# EAGLE board solderingSkillsFault (EAGLE 9.1.3)
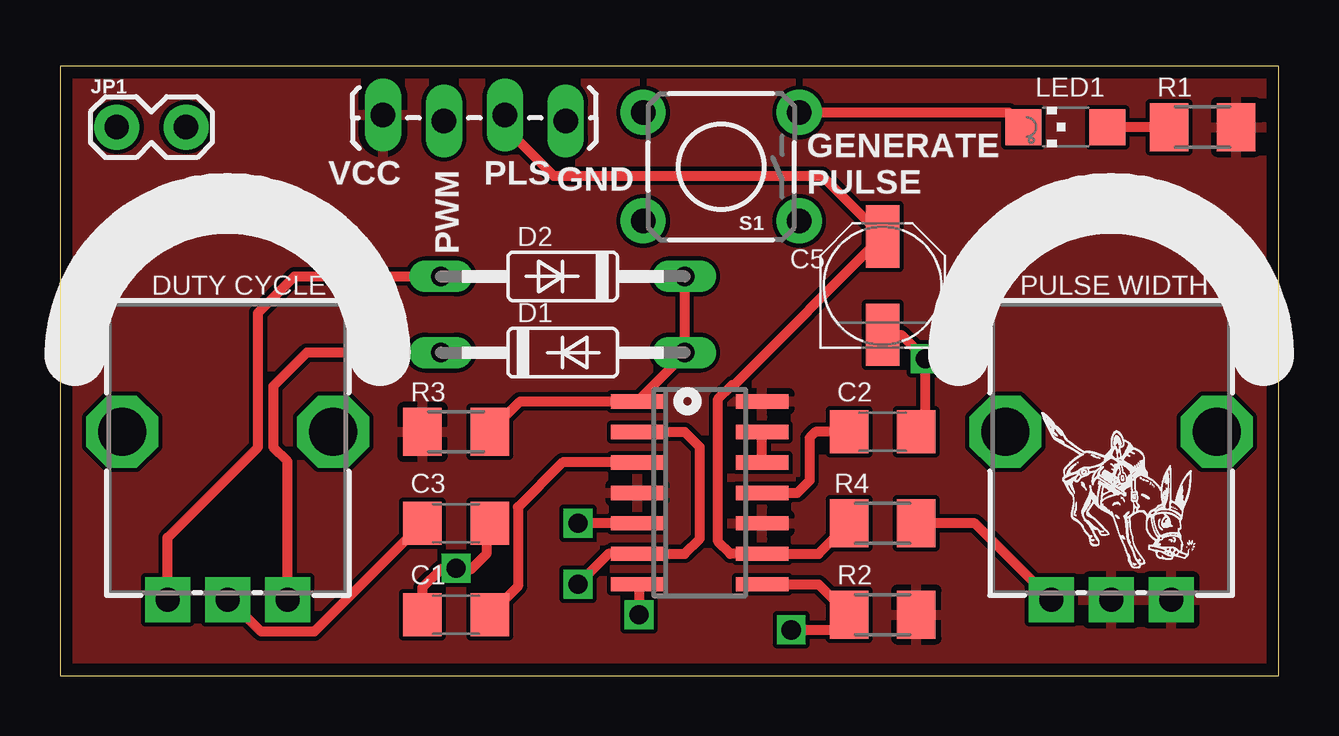
[diagram p0: board, top side]
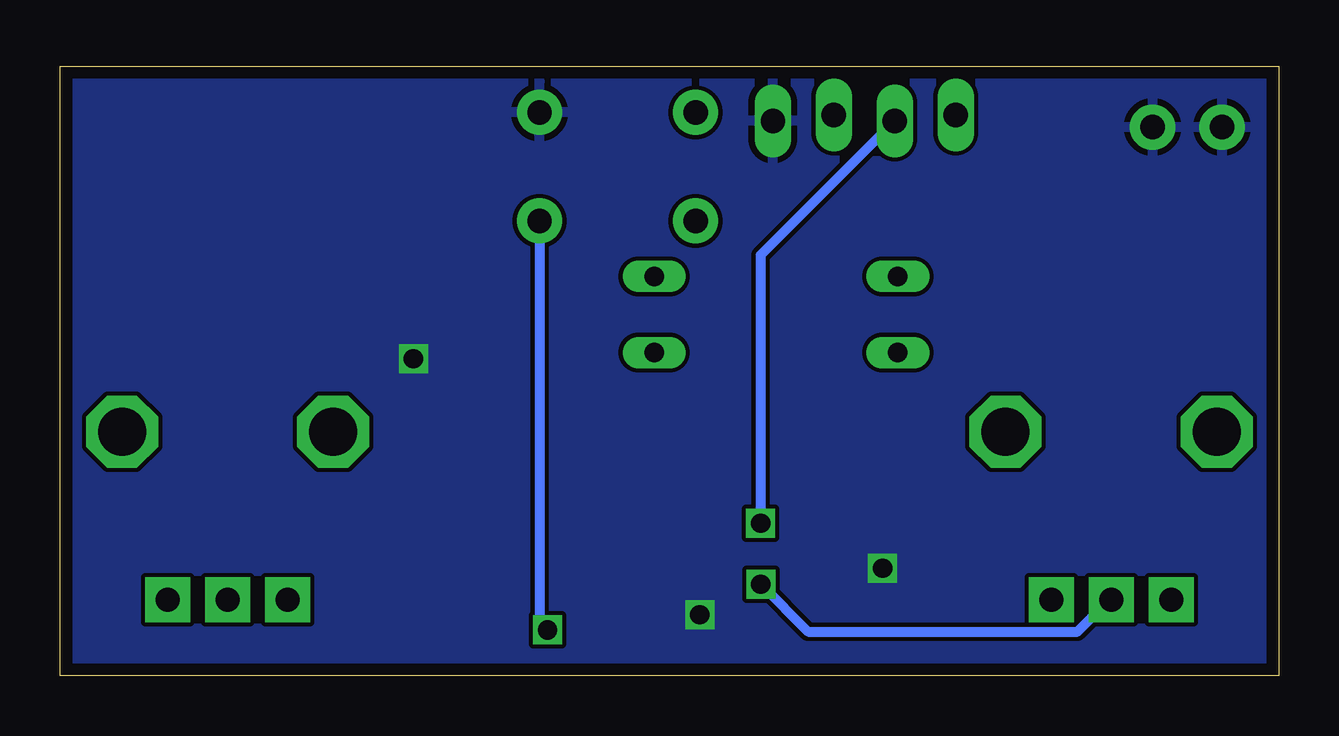
[diagram p1: board, bottom side, seen from below]

Size 50.8 x 25.4 mm. Coordinates in mm from the lower left corner, seen from the top.
Outline: 0,0 50.8,0 50.8,25.4 0,25.4 0,0
Copper layers (1*16): Top 0.0356mm / dielectric 1.5011mm / Bottom 0.0356mm
Design rules "solderingSkills *": minimum track width 7mil, minimum drill 14mil, track to track 7mil, track to pad 7mil, pad to pad 7mil, via to via 7mil, smd to smd 0mil, copper to edge 20mil, drill to drill 8mil, minimum pad ring 10mil, minimum via ring 8mil, stop-mask expansion 4mil, vias tented up to drill 0mil, thermal gap 10mil

## Footprints (pad centres in the part's own frame; a part is rotated, then mirrored left to right if it is on the bottom)
C1206 = smd 1.6 x 1.8: 1 -1.4,0; 2 1.4,0
PANASONIC_C = smd 2.6 x 1.4: + 2.05,0; - -2.05,0
DO35-10 = drill 0.813 long: A 5.08,0; C -5.08,0
SO14 = smd 0.6 x 2.2: 1 -3.81,-2.6; 2 -2.54,-2.6; 3 -1.27,-2.6; 4 0,-2.6; 5 1.27,-2.6; 6 2.54,-2.6; 7 3.81,-2.6; 8 3.81,2.6; 9 2.54,2.6; 10 1.27,2.6; 11 0,2.6; 12 -1.27,2.6; 13 -2.54,2.6; 14 -3.81,2.6
1X04_LOCK_LONGPADS = drill 1.016 long: 1 0,0; 2 2.54,-0.254; 3 5.08,0; 4 7.62,-0.254
1X02_LOCK = drill 1.016 pad 1.88: 1 -0.178,0; 2 2.718,0
CHIPLED_1206 = smd 1.5 x 1.5: A 0,-1.75; C 0,1.75
M1206 = smd 1.6 x 2: 1 -1.4,0; 2 1.4,0
TACTILE_SWITCH_PTH_6.0MM = drill 1.016 pad 1.88: 1 -3.251,2.261; 2 3.251,2.261; 3 -3.251,-2.261; 4 3.251,-2.261
POT-PTH-ALPS = drill 1 pad 1.88 square: P$1 7,-2.5; P$2 7,0; P$3 7,2.5 | drill 2 octagon: P$4 0,-4.4; P$5 0,4.4

## Placement (x,y rotation side)
C1  100nF  [C1206]  16.51,2.54 180 top
C2  100nF  [C1206]  34.29,10.16 0 top
C3  1uF  [C1206]  16.51,6.35 0 top
C5  100uF  [PANASONIC_C]  34.29,16.26 90 top
D1  1N4148DO35-10  [DO35-10]  20.95,13.46 0 top
D2  1N4148DO35-10  [DO35-10]  20.95,16.64 180 top
IC1  LM556D  [SO14]  26.67,7.62 270 top
J1  [1X04_LOCK_LONGPADS]  13.46,23.37 0 top
JP1  [1X02_LOCK]  2.54,22.86 0 top
LED1  [CHIPLED_1206]  41.91,22.86 90 top
R1  1k  [M1206]  47.62,22.86 0 top
R2  1k  [M1206]  34.29,2.54 0 top
R3  1k  [M1206]  16.51,10.16 180 top
R4  ??  [M1206]  34.29,6.35 0 top
S1  MOMENTARY-SWITCH-SPST-PTH-6.0MM  [TACTILE_SWITCH_PTH_6.0MM]  27.56,21.21 180 top
VR1  10k  [POT-PTH-ALPS]  6.99,10.16 270 top
VR2  10k  [POT-PTH-ALPS]  43.81,10.16 270 top

## Library data of the parts
C1-C3 R1-R4 = rcl
C5 = rcl; SPICEPREFIX: C
D1 D2 = diode
IC1 = linear
J1 = SparkFun-Connectors; PROD_ID: CONN-09696
JP1 = SparkFun-Retired
LED1 = led
S1 = SparkFun-Switches; PROD_ID: SWCH-08441; SF_SKU: COM-00097
VR1 VR2 = SparkFun-Resistors; PROD_ID: RES-09177; SF_SKU: COM-09288

## Nets
DISCH: D1.A D2.C IC1.1 R3.1
GND: C1.2 C2.2 C3.2 C5.- IC1.7 J1.4 JP1.1 JP1.2 LED1.C S1.3
N$1: C1.1 IC1.3
N$2: D1.C VR1.P$3
N$3: D2.A VR1.P$1
N$4: IC1.8 R2.1 S1.1
N$6: C2.1 IC1.11
N$7: LED1.A R1.1
N$8: IC1.12 IC1.13
N$9: R4.2 VR2.P$1
PULSE: C5.+ IC1.9 J1.3 R4.1
PWM: IC1.5 J1.2
TRIG: C3.1 IC1.2 IC1.6 VR1.P$2
V+: IC1.4 IC1.10 IC1.14 J1.1 R1.2 R2.2 R3.2 VR2.P$2 VR2.P$3

## Tracks (layer width: path | path; a pad name or v marks a point on that pad's centre or on a via)
DISCH
  Top 0.406: R3.1 19.18,11.43 IC1.1 | 23.5,11.43 IC1.1 | D2.C D1.A 26.04,13.39 IC1.1
GND  (via drill 0.8)
  Top 0.406: C1.2 15.11,3.68 15.88,4.45 17.14,4.45 | C3.2 17.78,6.22 17.78,5.08 17.14,4.45 | 17.14,4.45 v16.51,4.47 | IC1.7 24.13,3.75 v24.13,2.54 | S1.3 39.55,23.47 LED1.C | C5.- 35.07,14.21 v36.07,13.21 36.07,10.54 C2.2
  pour Bottom: 0,0 50.8,0 50.8,25.4 0,25.4
N$1
  Top 0.406: IC1.3 20.95,8.89 19.09,7.03 19.09,3.72 C1.1
N$2
  Top 0.406: VR1.P$3 9.48,8.93 8.89,9.53 8.89,12.06 10.29,13.46 D1.C
N$3
  Top 0.406: VR1.P$1 4.49,5.75 8.26,9.53 8.26,15.11 9.78,16.64 D2.A
N$4  (via drill 0.8)
  Top 0.406: IC1.8 31.62,3.81 R2.1 32.26,1.91 v30.48,1.91
  Bottom 0.406: S1.1 30.81,2.23 v30.48,1.91
N$6
  Top 0.406: IC1.11 30.73,7.62 31.24,8.13 31.24,9.91 31.5,10.16 C2.1
N$7
  Top 0.406: R1.1 LED1.A
N$8
  Top 0.406: IC1.12 IC1.13
N$9
  Top 0.406: VR2.P$1 38.12,6.35 R4.2
PULSE
  Top 0.406: R4.1 31.62,5.08 IC1.9 27.94,5.08 27.43,5.59 27.43,11.53 28.01,12.11 28.09,12.11 C5.+ 31.77,20.83 20.57,20.83 18.54,22.86 J1.3
PWM  (via drill 0.8)
  Top 0.406: IC1.5 v21.59,6.35
  Bottom 0.406: J1.2 21.59,17.52 v21.59,6.35
TRIG  (via drill 0.8)
  Top 0.406: IC1.2 26.04,10.16 26.67,9.53 26.67,5.71 26.04,5.08 IC1.6 22.86,5.08 v21.59,3.81 | VR1.P$2 7.07,3.16 8.39,1.84 10.6,1.84 C3.1
  Bottom 0.406: VR1.P$2 7.07,3.16 8.39,1.84 19.62,1.84 v21.59,3.81
V+
  pour Top: 0,0 0,25.4 50.8,25.4 50.8,0

## Text on the board
tPlace: PWM | VCC | PLS | GND | GENERATE / PULSE | DUTY CYCLE | PULSE WIDTH